# EAGLE board USB_Tester_3_board (EAGLE 6.5.0)
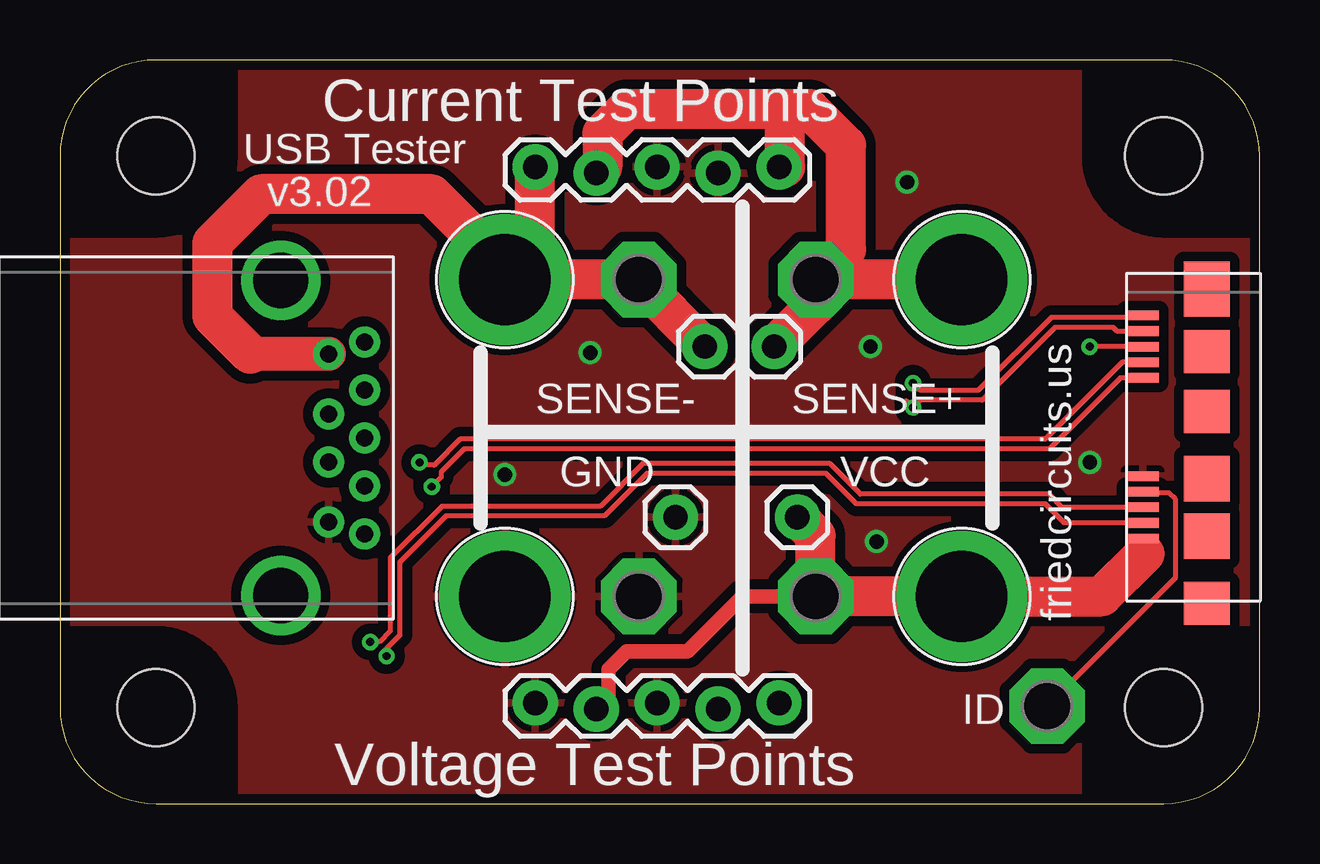
[diagram p0: board, top side]
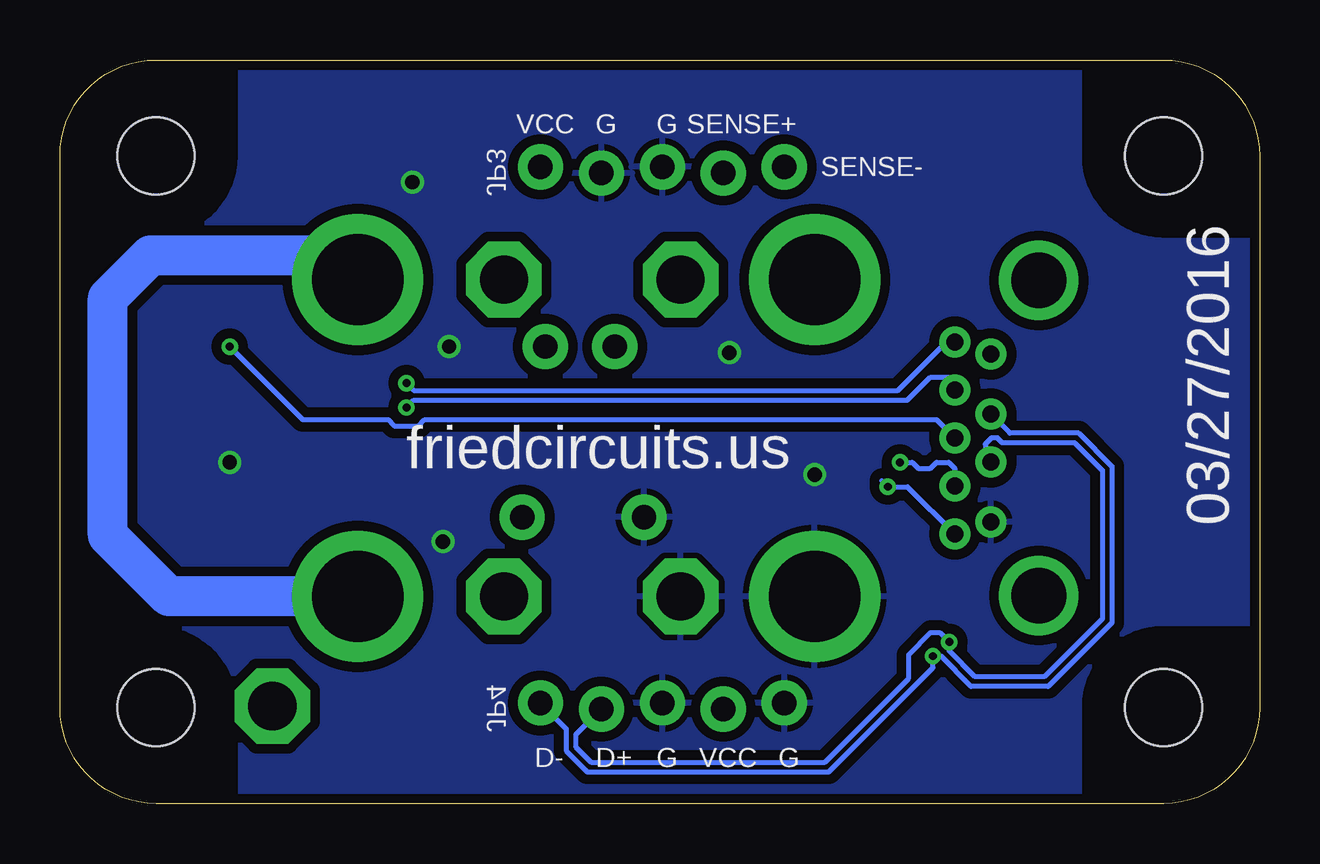
[diagram p1: board, bottom side, seen from below]

Size 50 x 31 mm. Coordinates in mm from the lower left corner, seen from the top.
Copper layers (1*16): Top 0.0356mm / dielectric 1.5011mm / Bottom 0.0356mm
Design rules "LaenPCBOrder *": minimum track width 6mil, minimum drill 13mil, track to track 6mil, track to pad 6mil, pad to pad 6mil, via to via 6mil, smd to smd 6mil, copper to edge 15mil, drill to drill 6mil, minimum pad ring 7mil, minimum via ring 7mil, stop-mask expansion 3mil, vias tented up to drill 30mil, thermal gap 10mil
Net classes: 0 default: width 0.203 mm, drill 0.33 mm; 1 VBUS: width 0.61 mm, drill 0.33 mm; 2 ID: width 0.254 mm, drill 0.33 mm; 3 USB_DIFF: width 0.203 mm, drill 0.33 mm, clearance 0.2 mm

## Footprints (pad centres in the part's own frame; a part is rotated, then mirrored left to right if it is on the bottom)
P1-20 = drill 2.007 pad 3.15 octagon: TP 0,0
BANANA_CONN = drill 3.81 pad 5.461: P$1 0,0
1X02_LOCK = drill 1.016 pad 1.88: 1 -0.178,0; 2 2.718,0
1X05_LOCK = drill 1.016 pad 1.88: 1 0,0.127; 2 2.54,-0.127; 3 5.08,0.127; 4 7.62,-0.127; 5 10.16,0.127
1X01 = drill 1.016 pad 1.88: 1 0,0
692622030100 = smd 0.4 x 1.35: 1 8,0.675; 2 7.35,0.675; 3 6.7,0.675; 4 6.05,0.675; 5 5.4,0.675; 6 1.3,0.675; 7 0.65,0.675; 8 0,0.675; 9 -0.65,0.675; 10 -1.3,0.675 | smd 1.8 x 1.9: Z1 10.7,3.35; Z4 2.7,3.35; Z5 0.2,3.35 | smd 1.9 x 1.9: Z2 7.9,3.35; Z3 5.5,3.35 | smd 2.3 x 1.9: Z6 -2.4,3.35
692121030100 = drill 0.7 pad 1.3: 1 3.5,1.5; 2 1,1.5; 3 -1,1.5; 4 -3.5,1.5; 5 -4,0; 6 -2,0; 7 0,0; 8 2,0; 9 4,0 | drill 2.3 pad 3.3: Z1 -6.57,3.5; Z2 6.57,3.5
DP5031_V1 = hole 3.2: 4,4; 46,4; 46,27; 4,27

## Placement (x,y rotation side)
ID  PTR1PAD1-20  [P1-20]  41.15,4.06 0 top
ID1  PTR1PAD1-20  [P1-20]  31.5,21.84 0 top
ID2  PTR1PAD1-20  [P1-20]  24.13,21.84 0 top
ID3  PTR1PAD1-20  [P1-20]  24.13,8.64 0 top
ID4  PTR1PAD1-20  [P1-20]  31.5,8.64 0 top
J1  [BANANA_CONN]  37.59,8.64 0 top
J2  [BANANA_CONN]  18.54,8.64 0 top
J3  [BANANA_CONN]  18.54,21.84 0 top
J4  [BANANA_CONN]  37.59,21.84 0 top
JP1  [1X02_LOCK]  27.05,19.05 0 top
JP3  [1X05_LOCK]  19.81,26.42 0 top
JP4  [1X05_LOCK]  19.81,4.06 0 top
JP6  M01PTH  [1X01]  25.65,11.94 0 top
JP7  M01PTH  [1X01]  30.73,11.94 0 top
K1  692622030100  [692622030100]  44.45,19.05 270 top
K2  692121030100  [692121030100]  12.7,15.24 90 top
PCB1  PCB_DP_RECTANGLE-31X50  [DP5031_V1]  0,0 0 top
U$1  FRAME_DINA4_L  [FC_CREDIT]  -2.54,-5.08 0 top  (outside the outline)

## Library data of the parts
ID ID1-ID4 = testpad
J1-J4 JP3 JP4 JP6 JP7 = SparkFun-Connectors
JP1 = SparkFun-Passives
K1 K2 = Wuerth_Elektronik_eiCan_Communication_Connectors_v2.2
PCB1 = dp_devices; PCB_SIZE: DP5031_V1
U$1 = FriedCircuits; AUTHOR: William Garrido; FF1: fulfillment by; FF2: FriedCircuits; FF3: friedcircuits.us; PROJECT: USB Tester v3.02; URL2: www.friedcircuits.us

## Nets
GND: ID3.TP J2.P$1 JP3.3 JP3.4 JP4.1 JP4.3 JP6.1 K1.5 K2.4
USB_D_N [USB_DIFF]: JP4.5 K1.2 K2.2
USB_D_P [USB_DIFF]: JP4.4 K1.3 K2.3
USB_GND_DRAIN: K1.8 K2.7
USB_ID: ID.TP K1.4
USB_SSRX_N [USB_DIFF]: K1.9 K2.8
USB_SSRX_P [USB_DIFF]: K1.10 K2.9
USB_SSTX_N [USB_DIFF]: K1.6 K2.5
USB_SSTX_P [USB_DIFF]: K1.7 K2.6
VBUSA [VBUS]: ID2.TP J3.P$1 JP1.1 JP3.1 K2.1
VBUSB [VBUS]: ID1.TP ID4.TP J1.P$1 J4.P$1 JP1.2 JP3.2 JP3.5 JP4.2 JP7.1 K1.1

## Tracks (layer width: path | path; a pad name or v marks a point on that pad's centre or on a via)
GND  (via drill 0.6)
  other vias: 34.04,10.92 42.93,14.22 22.1,18.8 18.54,13.72 35.31,25.91 33.78,19.05
  pour Top (isolate 0.406): 0,0 0,31.75 50.8,31.75 50.8,0
  pour Bottom (isolate 0.406): 0,0 50.8,0 50.8,31.75 0,31.75
USB_D_N  (via drill 0.33)
  Top 0.203: K1.2 41.86,11.7 41.06,12.5 33.19,12.5 31.92,13.77 24.47,13.77 22.69,11.99 16.09,11.99 14.17,10.08 14.17,7.03 13.61,6.46 v13.61,6.16 v13.61,6.15
  Bottom 0.203: JP4.5 28.9,3.12 28.9,2.2 28.02,1.32 17.95,1.32 13.61,5.66 v13.61,6.15 13.29,6.15 12.02,4.88 8.81,4.88 6.15,7.54 6.15,14.05 7.54,15.44 10.41,15.44 11.2,16.23 K2.2
USB_D_P  (via drill 0.33)
  Top 0.203: K1.3 41.78,12.35 41.23,12.9 33.36,12.9 32.09,14.17 24.3,14.17 22.52,12.39 15.92,12.39 13.77,10.24 13.77,7.2 13.32,6.75 12.94,6.75 v12.93,6.73
  Bottom 0.203: JP4.4 28.5,2.87 28.5,2.37 27.86,1.73 18.12,1.73 14.62,5.22 14.62,6.21 13.7,7.13 13.32,7.13 v12.93,6.73 | v12.93,6.73 12.93,6.36 11.85,5.28 8.97,5.28 6.55,7.7 6.55,13.89 7.7,15.04 10.72,15.04 10.92,15.24 11.18,15.24 11.43,14.99 11.43,14.47 K2.3 11.2,14.25 | 13.06,6.86 v12.93,6.73
USB_GND_DRAIN  (via drill 0.33)
  Top 0.203: K1.8 v42.93,19.05
  Bottom 0.203: v42.93,19.05 39.88,16 36.32,16 36.07,15.75 35.05,15.75 34.8,16 13.46,16 K2.7
USB_ID
  Top 0.203: ID.TP 46.48,9.4 46.48,12.7 46.23,12.95 45.17,12.95 K1.4
USB_SSRX_N  (via drill 0.33)
  Top 0.203: 35.28,16.79 v35.56,16.51 35.87,16.82 38.44,16.82 41.49,19.86 43.89,19.86 44.05,19.7 K1.9
  Bottom 0.203: v35.56,16.51 35.25,16.82 14.68,16.82 13.72,17.78 12.95,17.78 12.7,17.53 K2.8
USB_SSRX_P  (via drill 0.33)
  Top 0.203: K1.10 45.04,20.27 41.32,20.27 38.27,17.22 35.87,17.22 v35.56,17.53
  Bottom 0.203: v35.56,17.53 35.25,17.22 15.07,17.22 13.05,19.24 K2.9
USB_SSTX_N  (via drill 0.33)
  Top 0.203: K1.6 44.2,17.75 41.23,14.78 16.85,14.78 15.89,13.83 15.89,13.61 v15.49,13.21 15.75,13.46
  Bottom 0.203: K2.5 14.67,13.21 v15.49,13.21 15.75,13.46
USB_SSTX_P  (via drill 0.33)
  Top 0.203: K1.7 44.28,18.4 41.06,15.19 16.68,15.19 15.61,14.11 15.1,14.11 v14.99,14.22
  Bottom 0.203: K2.6 12.7,13.97 12.95,14.22 13.46,14.22 13.72,13.97 14.22,13.97 14.48,14.22 v14.99,14.22
VBUSA
  Top 1.422: K2.1 7.93,18.74
  Top 1.676: 19.05,21.84 ID2.TP 24.13,21.79 JP1.1 | 19.05,21.84 J3.P$1 19.81,23.11 JP3.1 | 7.93,18.74 6.35,20.32 6.35,23.37 8.38,25.4 15.49,25.4 19.05,21.84
VBUSB
  Top 0.406: 45.21,10.41 45.21,10.96 K1.1
  Top 0.61: 30.73,8.64 28.45,8.64 26.16,6.35 23.62,6.35 22.86,5.59 22.86,4.45 JP4.2
  Top 1.676: ID4.TP J1.P$1 43.43,8.64 45.21,10.41 | ID4.TP 30.73,8.64 | J4.P$1 ID1.TP | ID4.TP 31.5,11.18 JP7.1 | ID1.TP 31.5,20.78 JP1.2 | ID1.TP 32.77,23.11 32.77,27.43 31.24,28.96 30.23,28.96 | 30.23,28.96 23.62,28.96 22.61,27.94 22.61,26.54 JP3.2 | JP3.5 30.23,26.54 30.23,28.96
  Bottom 1.676: J1.P$1 45.47,8.64 48.01,11.18 48.01,21.08 46.23,22.86 38.1,22.86 37.08,21.84 J4.P$1

## Text on the board
tPlace: Current Test Points | USB Tester | v3.02 | SENSE- | SENSE+ | GND | VCC | friedcircuits.us | Voltage Test Points
bPlace: SENSE+ | G | G | VCC | SENSE- | 03/27/2016 | friedcircuits.us | G | VCC | G | D+ | D-